# EAGLE board keyboard_adc (EAGLE 5.11)
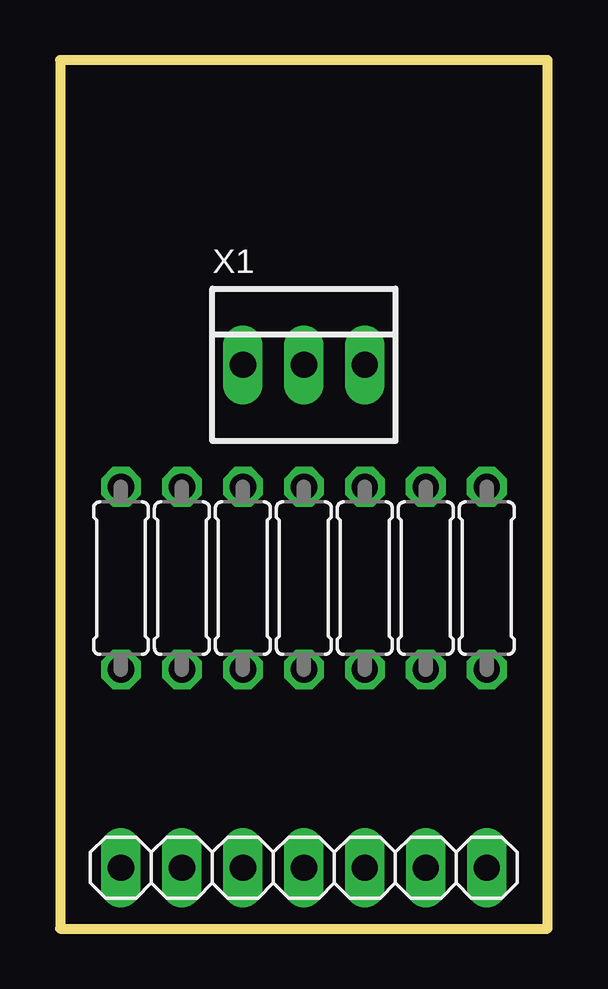
[diagram p0: board, top side]
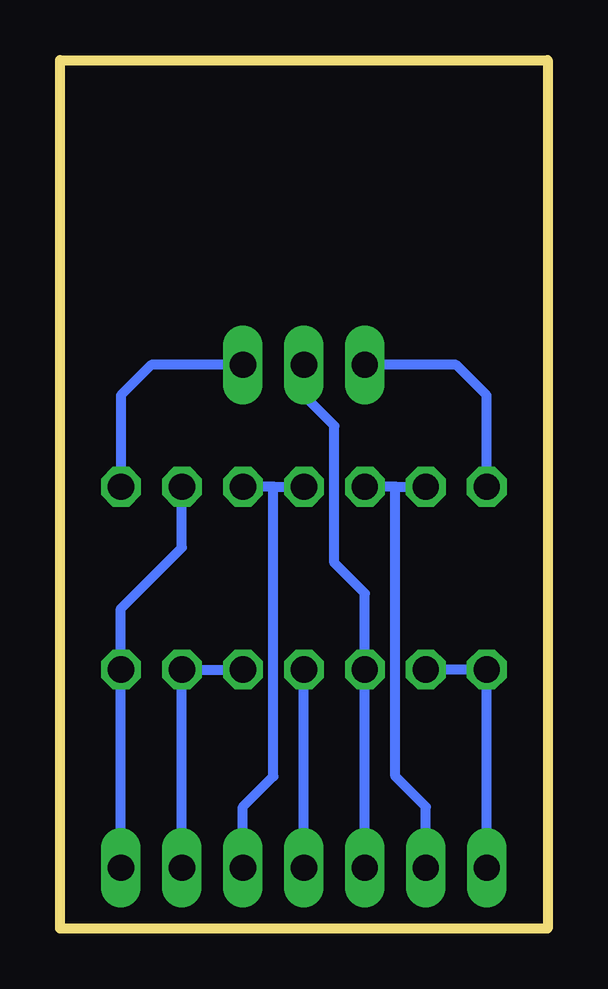
[diagram p1: board, bottom side, seen from below]

Size 20.32 x 36.2 mm. Coordinates in mm from the lower left corner, seen from the top.
Outline: 20.32,36.2 0,36.2 0,0 20.32,0 20.32,36.2
Copper layers (1*16): Top 0.035mm / dielectric 1.5mm / Bottom 0.035mm
Design rules "default": minimum track width 10mil, minimum drill 24mil, track to track 8mil, track to pad 8mil, pad to pad 8mil, via to via 8mil, smd to smd 8mil, copper to edge 40mil, drill to drill 8mil, minimum pad ring 10mil, minimum via ring 8mil, stop-mask expansion 4mil, vias tented up to drill 0mil, thermal gap 10mil

## Footprints (pad centres in the part's own frame; a part is rotated, then mirrored left to right if it is on the bottom)
1X01 = drill 1.1 long: 1 0,0
0207/7 = drill 1.1 octagon: 1 -3.81,0; 2 3.81,0
22-23-2031 = drill 1.1 long: 1 -2.54,0; 2 0,0; 3 2.54,0

## Placement (x,y rotation side)
JP2  L4  [1X01]  17.78,2.54 180 top
JP3  L3  [1X01]  15.24,2.54 180 top
JP4  L2  [1X01]  12.7,2.54 180 top
JP5  L1  [1X01]  10.16,2.54 180 top
JP6  C3  [1X01]  7.62,2.54 180 top
JP7  C2  [1X01]  5.08,2.54 180 top
JP8  C1  [1X01]  2.54,2.54 180 top
R1  180  [0207/7]  17.78,14.61 270 top
R2  680  [0207/7]  15.24,14.61 270 top
R3  3k3  [0207/7]  12.7,14.61 90 top
R4  15k  [0207/7]  10.16,14.61 90 top
R5  1k  [0207/7]  7.62,14.61 90 top
R6  820  [0207/7]  5.08,14.61 270 top
R7  1k  [0207/7]  2.54,14.61 90 top
X1  [22-23-2031]  10.16,23.5 0 top

## Library data of the parts
JP2-JP8 R1-R7 X1 = keyboard_adc

## Nets
+5V: R1.1 X1.3
ADC: JP6.1 R5.1 X1.2
GND: R7.2 X1.1
N$2: JP2.1 R1.2 R2.1
N$3: JP3.1 R2.2 R3.1
N$4: JP4.1 R3.2 R4.2
N$5: JP5.1 R4.1
N$7: JP8.1 R6.2 R7.1
N$8: JP7.1 R5.2 R6.1

## Tracks (layer width: path | path; a pad name or v marks a point on that pad's centre or on a via)
+5V
  Bottom 0.406: R1.1 17.78,22.23 16.51,23.5 X1.3
ADC
  Bottom 0.406: JP6.1 R5.1 7.62,13.97 8.89,15.24 8.89,20.95 10.16,22.23 X1.2
GND
  Bottom 0.406: R7.2 2.54,22.23 3.81,23.5 X1.1
N$2
  Bottom 0.406: R2.1 15.24,15.88 17.78,13.34 R1.2 JP2.1
N$3
  Bottom 0.406: R3.1 R2.2 JP3.1
N$4
  Bottom 0.406: JP4.1 12.7,5.08 11.43,6.35 11.43,18.41 | 11.43,18.41 R4.2 | 11.43,18.41 R3.2
N$5
  Bottom 0.406: JP5.1 R4.1
N$7
  Bottom 0.406: JP8.1 R7.1 R6.2
N$8
  Bottom 0.406: 6.35,18.41 R6.1 | 6.35,18.41 R5.2 | JP7.1 5.08,5.08 6.35,6.35 6.35,18.41